# Altium PCB ECG_ACCEL_Board.PcbDoc
Units mm, origin at the board's own origin, x right, y up, seen from the top; angles counter-clockwise.
Board outline 30 x 19 mm, 4 copper layers (Top Layer, Int1 (GND), Int2 (PWR), Bottom Layer), stack 1.334 mm thick; 55 components, 35 nets, 191 pads, 96 vias.
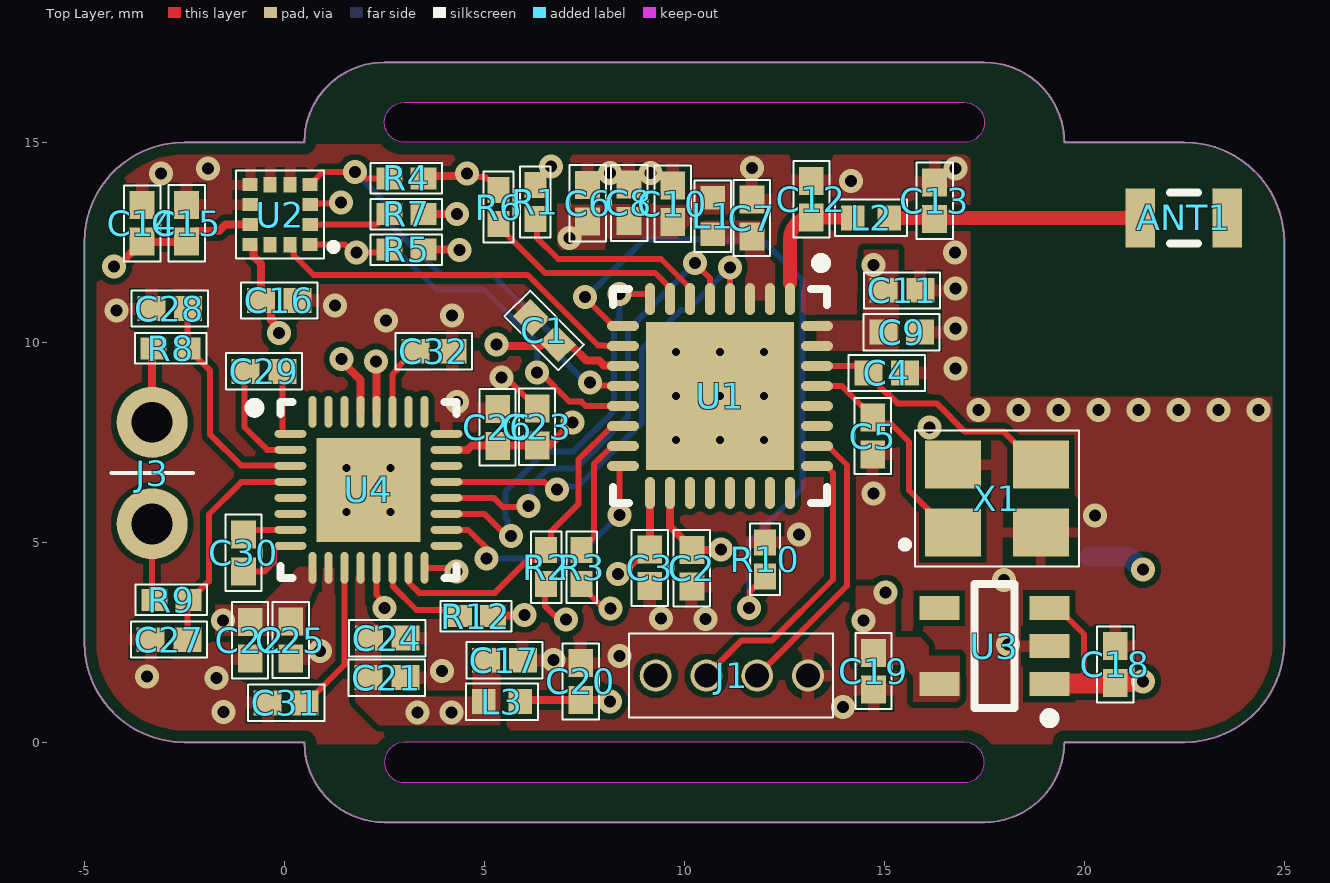
[diagram p0: Top Layer view]
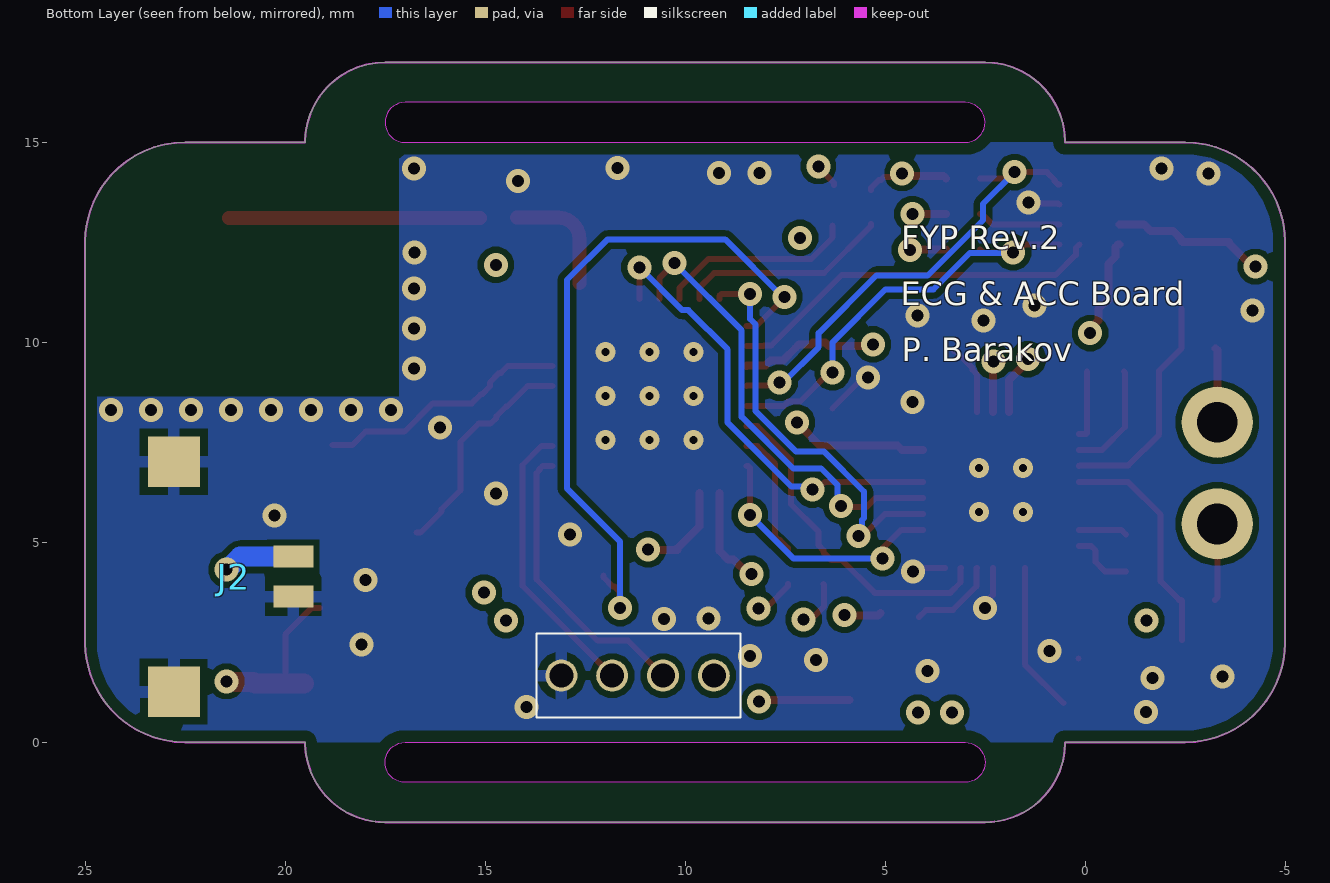
[diagram p1: Bottom Layer view, seen from below]
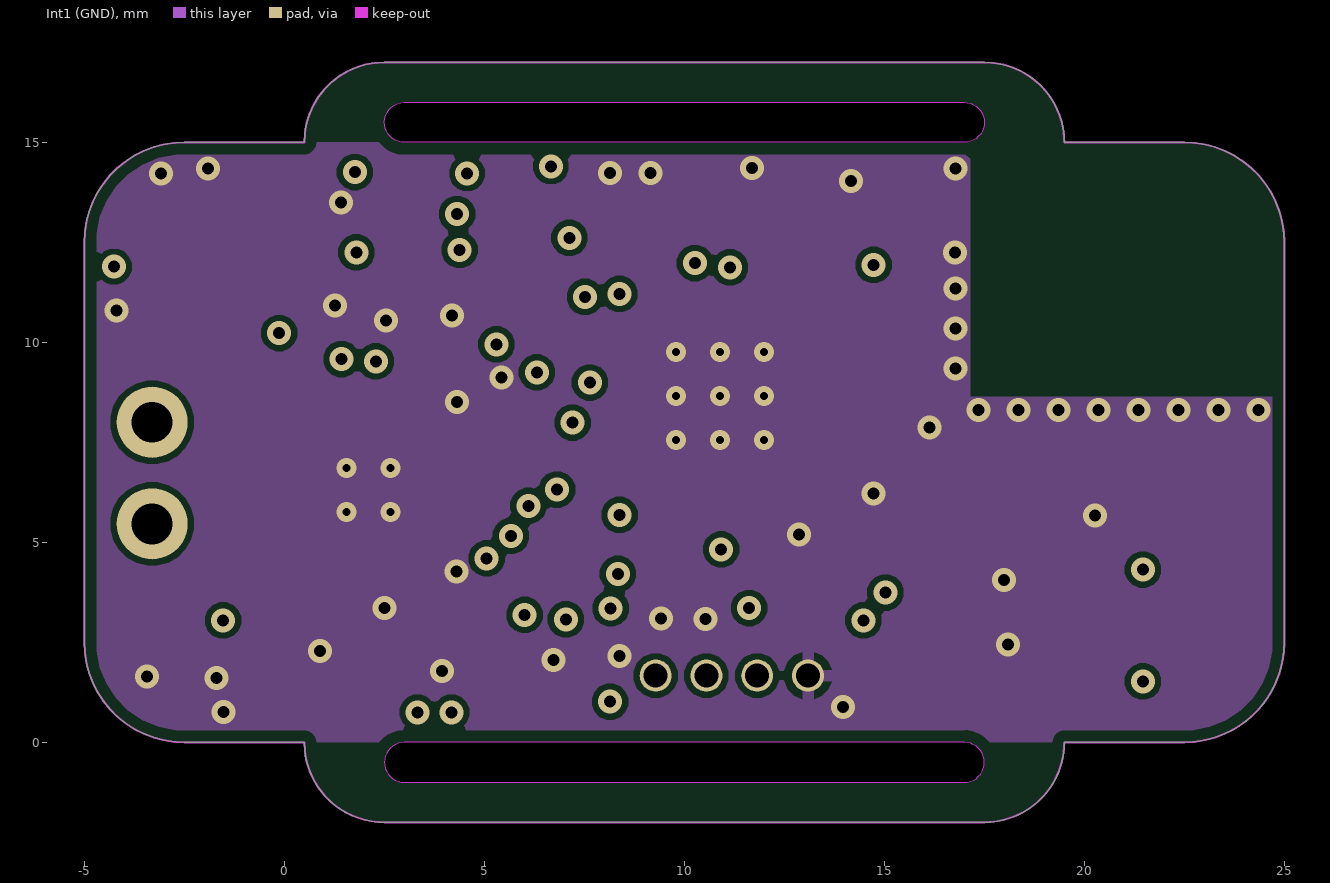
[diagram p2: Int1 (GND)]
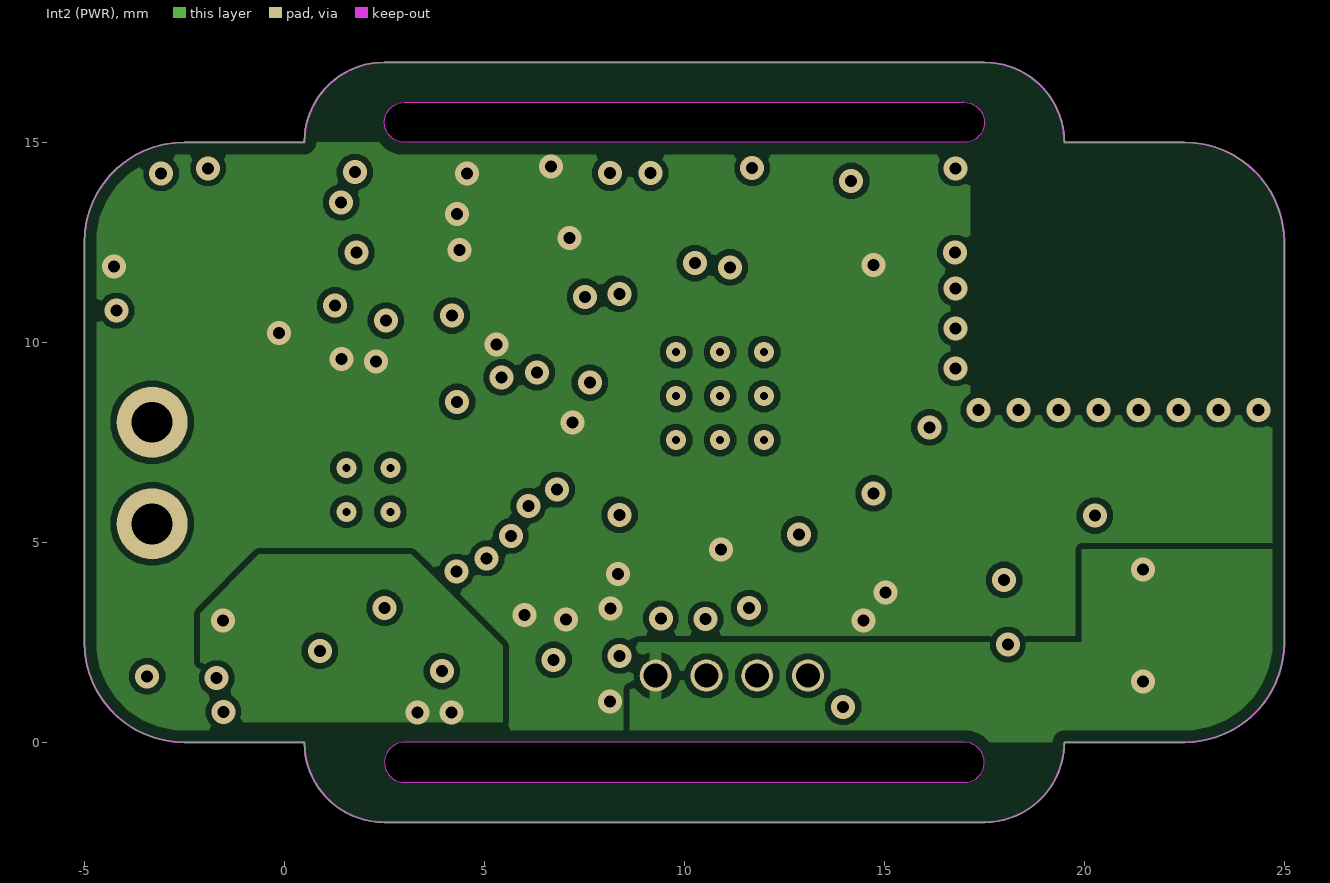
[diagram p3: Int2 (PWR)]
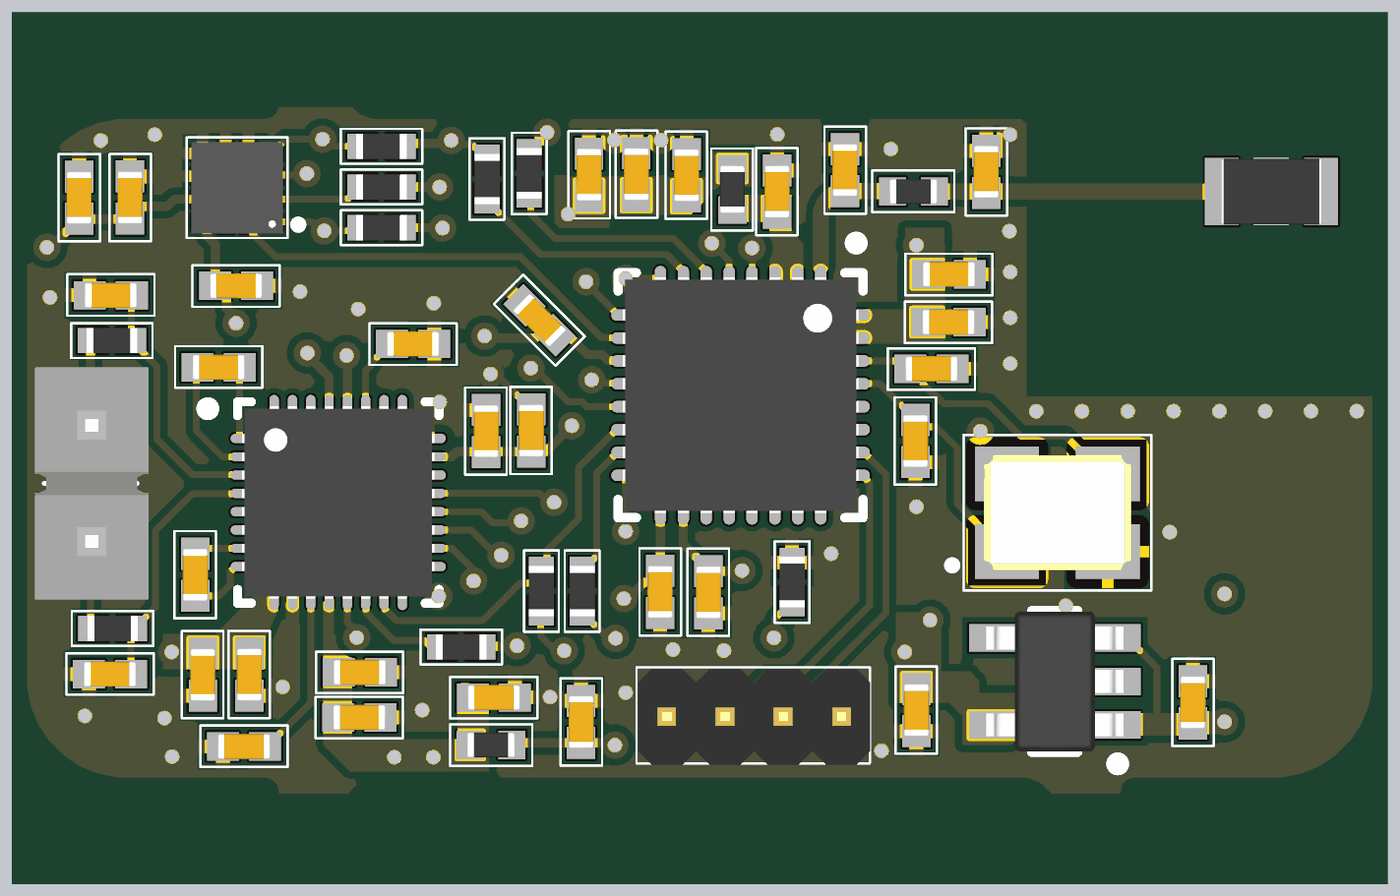
[diagram p4: 3D render of the assembled board from above, using the file's embedded part models]

## Layer stack, top to bottom
Top Solder: solder mask 0.0254, SM-001, Dk 4
Top Layer: signal copper 0.035
Dielectric 1: prepreg 0.1295, PP-017, Dk 4.3
Dielectric 2: prepreg 0.1295, PP-017, Dk 4.3
Int1 (GND): signal copper 0.0175
Dielectric 3: core 0.7112, Core-039, Dk 4.8
Int2 (PWR): signal copper 0.0175
Dielectric 4: prepreg 0.1295, PP-017, Dk 4.3
Dielectric 5: prepreg 0.1295, PP-017, Dk 4.3
Bottom Layer: signal copper 0.035
Bottom Solder: solder mask 0.0254, SM-001, Dk 4

## Board outline
-2.5,0 0.5,0 ccw(c2.5,0) 2.5,-2 17.5,-2 ccw(c17.5,0) 19.5,0 22.5,0 ccw(c22.5,2.5) 25,2.5 25,12.5 ccw(c22.5,12.5) 22.5,15 19.5,15 ccw(c17.5,15) 17.5,17 2.5,17 ccw(c2.5,15) 0.5,15 -2.5,15 ccw(c-2.5,12.5) -5,12.5 -5,2.5 ccw(c-2.5,2.5)
cut-out: 2.5,-0.5 ccw(c3,-0.5) 3,-1 17,-1 ccw(c17,-0.5) 17.5,-0.5 ccw(c17,-0.5) 17,0 3,0 ccw(c3,-0.5)
cut-out: 3,15 cw(c3,15.5) 2.5,15.5 cw(c3,15.5) 3,16 17,16 cw(c17,15.5) 17.5,15.5 cw(c17,15.5) 17,15

## Design rules (kind name [scope] priority, off if disabled: settings)
BoardOutlineClearance BoardOutlineClearance_1 [All] p1: gap=0.3 ignorepadtopadclearanceinfootprint=FALSE
Clearance "Stitching GND" [IsStitchingVia and InNet('GND') vs (IsVia and (Not IsStitchingVia)) Or IsPad] p1: gap=0.1 ignorepadtopadclearanceinfootprint=FALSE
Clearance Clearance_1 [(ExistsOnLayer('Int1 (GND)') Or ExistsOnLayer('Int2 (PWR)')) vs (ExistsOnLayer('Int1 (GND)') Or ExistsOnLayer('Int2 (PWR)'))] p2: gap=0.15 ignorepadtopadclearanceinfootprint=FALSE except(0.2: Arc-Arc Arc-Track Arc-Text Track-Track Track-Text Text-Text; 0.254: Hole-Hole) sourcerule=47 cellrowname=All cellrowtype=0 cellcolname=All cellcoltype=0 innerlayers=TRUE
Clearance Clearance_2 [(ExistsOnLayer('Top Layer') Or ExistsOnLayer('Bottom Layer')) vs (ExistsOnLayer('Top Layer') Or ExistsOnLayer('Bottom Layer'))] p3: gap=0.15 ignorepadtopadclearanceinfootprint=FALSE except(0.2: Arc-Arc Arc-Track Arc-Text Track-Track Track-Text Text-Text; 0.254: Hole-Hole) sourcerule=47 cellrowname=All cellrowtype=0 cellcolname=All cellcoltype=0 outerlayers=TRUE
Clearance [All] p4: gap=0.254 ignorepadtopadclearanceinfootprint=FALSE ismatrix=TRUE
HoleSize None [HasFootprint('QFN*') OR HasFootprint('XCL2*')] p1: absolutevalues=TRUE maxlimit=2.54 minlimit=0 maxpercent=80.000 minpercent=20.000
HoleSize [All] p2: absolutevalues=TRUE maxlimit=6.3 minlimit=0.3 maxpercent=80.000 minpercent=20.000
HoleToHoleClearance [All] p1: gap=0.5 allowstackedmicrovias=TRUE
MinimumSolderMaskSliver MinimumSolderMaskSliver_1 [All] p1: minsoldermaskwidth=0
MinimumSolderMaskSliver [All] p2: minsoldermaskwidth=0.1
PlaneConnect [All] p1: planeconnectstyle=Relief reliefexpansion=0.508 reliefentries=2 reliefconductorwidth=0.254 reliefairgap=0.254
PolygonConnect GND_Via_Connect [IsVia] p1: thpad.connectstyle=Relief thpad.reliefconductorwidth=0.3 thpad.reliefentries=2 thpad.polygonreliefangle="0 Angle" thpad.airgapwidth=0.2 smdpad.connectstyle=Relief smdpad.reliefconductorwidth=0.3 smdpad.reliefentries=2 smdpad.polygonreliefangle="0 Angle" smdpad.airgapwidth=0.2 via.connectstyle=Direct via.reliefconductorwidth=0.254 via.reliefentries=2 via.polygonreliefangle="0 Angle" via.airgapwidth=0.254
PolygonConnect "Direct Connect" [IsNamedPolygon('3.3VPOUR1') OR IsNamedPolygon('3.3V_PINS2_3') OR IsNamedPolygon('3.3V_POUR2') OR IsNamedPolygon('3.3V_POUR3') OR IsNamedPolygon('3.3V_POUR4') OR IsNamedPolygon('FB_POUR') OR IsNamedPolygon('1.8V_BUCK_POUR') OR IsNamedPolygon('1.8V_BOTTOM') OR IsNamedPolygon('+A3V3_POUR1') OR IsNamedPolygon('A3V3_POUR2')] p2: connectstyle=Direct reliefconductorwidth=0.3 reliefentries=4 polygonreliefangle="45 Angle" airgapwidth=0.2
PolygonConnect [All] p3: connectstyle=Relief reliefconductorwidth=0.3 reliefentries=4 polygonreliefangle="90 Angle" airgapwidth=0.2
RoutingVias [All] p1: holewidth=0.3 width=0.6 viastyle="Through Hole" minholewidth=0.3 minwidth=0.6 maxholewidth=0.3 maxwidth=0.6
SilkToSilkClearance [All] p1: silktosilkclearance=0.1
SilkToSolderMaskClearance [IsPad] p1: minsilkscreentomaskgap=0.08 clearancetoexposedcopper=TRUE
SolderMaskExpansion ViaMasl [IsVia] p1: expansion=0.102 istentingtop=TRUE useseparateexpansions=TRUE expansionbottom=0.102 istentingbottom=TRUE
SolderMaskExpansion [All] p2: expansion=0.05 istentingtop=FALSE
SupplyNets "Schematic Supply Nets_1" [InNet('+A3.3V')] p1: voltage=0.000
SupplyNets "Schematic Supply Nets_3" [InNet('+VBAT')] p2: voltage=0.000
SupplyNets "Schematic Supply Nets_2" [InNet('GND')] p3: voltage=0.000
SupplyNets "Schematic Supply Nets" [InNet('+3.3V')] p4: voltage=0.000
UnRoutedNet [All] p1: checkbadconnections=TRUE
Width MaxMinWidth_1 [All] p1: maxlimit=0.7 minlimit=0.1 preferedwidth=0.15 minimp=50.000000 maximp=50.000000 favimp=50.000000
23 further rules are at their usual default settings.

## Classes and differential pairs
component class SH1: C17 C20 C21 C22 C23 C24 C25 C26 C27 C28 C29 C30 C31 C32 J3 L3 R8 R9 R12 U4
component class ECG_ACCEL_Board: ANT1 C1 C2 C3 C4 C5 C6 C7 C8 C9 C10 C11 C12 C13 C14 C15 C16 C18 C19 J1 J2 L1 L2 R1 R2 R3 R4 R5 R6 R7 R10 U1 U2 U3 X1

## Components (designator, comment, footprint, x,y, rotation, side; value= is the part's Value field where it differs from the comment)
ANT1 "2.4GHZ_ANT_50_OHM" Chip2PinSM127P600-8N 22.488,13.109 r0 top
C1 "C_0402_0.1uF" C_0402 6.501,10.299 r135 top
C2 "C_0402_0.1uF" C_0402 10.191,4.352 r90 top
C3 "C_0402_0.1uF" C_0402 9.134,4.363 r270 top
C4 "C_0402_10pF" C_0402 15.061,9.236 r180 top
C5 "C_0402_10pF" C_0402 14.712,7.658 r90 top
C6 "C_0402_10uF" C_0402 7.581,13.477 r270 top
C7 "C_0402_0.1uF" C_0402 11.689,13.107 r90 top
C8 "C_0402_1uF" C_0402 8.615,13.487 r270 top
C9 "C_0402_10nF" C_0402 15.434,10.256 r180 top
C10 "C_0402_0.1uF" C_0402 9.712,13.464 r90 top
C11 "C_0402_0.1uF" C_0402 15.442,11.3 r180 top
C12 "C_0402_3.3pF" C_0402 13.173,13.577 r270 top
C13 "C_0402_3.3pF" C_0402 16.256,13.54 r270 top
C14 "C_0402_10uF" C_0402 -3.557,12.975 r270 top
C15 "C_0402_0.1uF" C_0402 -2.445,12.979 r270 top
C16 "C_0402_0.1uF" C_0402 -0.127,11.049 r180 top
C17 "C_0402_0.1uF" C_0402 5.503,2.054 r180 top
C18 "C_0402_1uF" C_0402 20.771,1.948 r270 top
C19 "C_0402_1uF" C_0402 14.732,1.778 r90 top
C20 "C_0402_0.1uF" C_0402 7.409,1.521 r270 top
C21 "C_0402_1uF" C_0402 2.565,1.62 r180 top
C22 "C_0402_1uF" C_0402 -0.853,2.552 r90 top
C23 "C_0402_1uF" C_0402 6.321,7.886 r90 top
C24 "C_0402_0.1uF" C_0402 2.574,2.606 r180 top
C25 "C_0402_0.1uF" C_0402 0.163,2.555 r90 top
C26 "C_0402_0.1uF" C_0402 5.334,7.874 r90 top
C27 "C_0402_4.7nF" C_0402 -2.883,2.564 r0 top
C28 "C_0402_4.7nF" C_0402 -2.865,10.843 r0 top
C29 "C_0402_4.7nF" C_0402 -0.508,9.271 r0 top
C30 "C_0402_4.7nF" C_0402 -1.017,4.736 r90 top
C31 "C_0402_1uF" C_0402 0.045,0.984 r0 top
C32 "C_0402_1uF" C_0402 3.739,9.779 r180 top
J1 "4PIN_HEADER_1.27" 4PIN_HEADER_1.27-Footprint-1 13.092,1.669 r180 top
J2 "503763-0291" "Molex 503763-0291" 20.443,4.64 r90 bottom
J3 "2PIN_2.54mm" 2PIN_2.54mm-Footprint-1 -3.305,8.001 r270 top
L1 "L_0402_2.2nH" L_0402 10.713,13.157 r270 top
L2 "L_0402_2.2nH" L_0402 14.667,13.109 r180 top
L3 "L_0402_2.2nH" L_0402 5.441,1.018 r0 top
R1 "R_0402_4k7" R_0402 6.275,13.505 r270 top
R2 "R_0402_4k7" R_0402 6.542,4.378 r90 top
R3 "R_0402_4k7" R_0402 7.431,4.378 r90 top
R4 "R_0402_4k7" R_0402 3.048,14.097 r180 top
R5 "R_0402_4k7" R_0402 3.048,12.319 r180 top
R6 "R_0402_4k7" R_0402 5.354,13.38 r270 top
R7 "R_0402_4k7" R_0402 3.048,13.208 r180 top
R8 "R_0402_51k" R_0402 -2.84,9.851 r180 top
R9 "R_0402_51k" R_0402 -2.826,3.562 r180 top
R10 "R_0402_4k7" R_0402 12.017,4.576 r90 top
R12 "R_0402_4k7" R_0402 4.79,3.157 r0 top
U1 "ESP32-C3" QFN127P600-8N#1 10.892,8.658 r270 top
U2 "LIS2DE12" LIS2DE12-Footprint-1 0.645,12.443 r180 top
U3 "TLV75533PDBVR" SOT95P280X145-5N 17.754,2.405 r180 top
U4 "ADS1292" QFN127P600-8N#2 2.104,6.314 r0 top
X1 "40MHz_OSC" 40MHz_OSC-Footprint-1 16.713,6.942 r0 top

## Footprints (in the part's own frame and the unit in brackets; to place one, negate y for a bottom-side part, rotate by r counter-clockwise, add the part's x,y. Pads: shape width x height; smd on the part's side, far side on the other; paste and mask are expansions set on the pad)
2PIN_2.54mm-Footprint-1 [mil]
  round 70 hole 40.16: 1(0,0) 2(100,0)
  silkscreen extent 50,-40 50,40, body extent -50,-48 150,50, height 330
4PIN_HEADER_1.27-Footprint-1 [mm]
  round 0.8 hole 0.6: 1(0,0) 2(1.27,0) 3(2.54,0) 4(3.81,0)
  silkscreen extent -0.63,-1.05 4.47,1.05, body extent -0.64,-1.02 4.44,1.08, height 4
40MHz_OSC-Footprint-1 [mm]
  rect 1.4x1.2 smd mask+0.2: 1(0,-1.7) 2(2.2,-1.7) 3(2.2,0) 4(0,0)
  silkscreen extent -1.25,-2.55 3.15,0.85, body extent -0.5,-2.1 2.7,0.4, height 0.6
C_0402 [mm]
  rect 0.7x0.62 smd: 1(-0.46,0) 2(0.46,0)
  silkscreen extent -0.95,-0.45 0.95,0.46, body extent -0.58,-0.28 0.57,0.28, height 0.55
Chip2PinSM127P600-8N [mm]
  rect 0.74x1.47 smd: 1(-1.085,0) 2(1.085,0)
  silkscreen extent -0.35,-0.64 0.35,0.64, body extent -1.1,-0.72 1.1,0.72, height 1.2
L_0402 [mm]
  rect 0.59x0.62 smd: 1(-0.455,0) 2(0.455,0)
  silkscreen extent -0.89,-0.46 0.9,0.45, body extent -0.53,-0.28 0.53,0.28, height 0.55
LIS2DE12-Footprint-1 [mm]
  rect 0.38x0.32 smd mask+0.1: 1(0,0) 4(0,-1.5) 7(1.5,-1.5) 10(1.5,0)
  rect 0.39x0.32 smd mask+0.1: 2(0,-0.5) 3(0,-1) 8(1.5,-1) 9(1.5,-0.5)
  rect 0.32x0.39 smd mask+0.1: 5(0.5,-1.5) 6(1,-1.5) 11(1,0) 12(0.5,0)
  silkscreen extent -0.64,-1.85 1.85,0.35, body extent -0.25,-1.75 1.75,0.25, height 1
"Molex 503763-0291" [mm] "Picolock 1.0mm pitch 2-pin"
  rect 0.55x1 smd: 1(0,-0.65) 2(-1,-0.65)
  rect 1.26x1.3 smd: 3(2.375,2.34) 4(-3.375,2.34)
  body extent -3.88,-1.03 2.72,4.16, height 1.47
QFN127P600-8N#1 [mm]
  oval 0.8x0.25 smd: 1(-2.425,1.75) 2(-2.425,1.25) 3(-2.425,0.75) 4(-2.425,0.25) 5(-2.425,-0.25) 6(-2.425,-0.75) 7(-2.425,-1.25) 8(-2.425,-1.75) 17(2.425,-1.75) 18(2.425,-1.25) 19(2.425,-0.75) 20(2.425,-0.25) 21(2.425,0.25) 22(2.425,0.75) 23(2.425,1.25) 24(2.425,1.75)
  oval 0.25x0.8 smd: 9(-1.75,-2.425) 10(-1.25,-2.425) 11(-0.75,-2.425) 12(-0.25,-2.425) 13(0.25,-2.425) 14(0.75,-2.425) 15(1.25,-2.425) 16(1.75,-2.425) 25(1.75,2.425) 26(1.25,2.425) 27(0.75,2.425) 28(0.25,2.425) 29(-0.25,2.425) 30(-0.75,2.425) 31(-1.25,2.425) 32(-1.75,2.425)
  rect 3.7x3.7 smd: 33(0,0)
  silkscreen extent -3.45,-2.68 2.68,2.67, body extent -2.58,-2.58 2.58,2.58, height 0.9
QFN127P600-8N#2 [mm]
  oval 0.8x0.2 smd: 1(-1.95,1.4) 2(-1.95,1) 3(-1.95,0.6) 4(-1.95,0.2) 5(-1.95,-0.2) 6(-1.95,-0.6) 7(-1.95,-1) 8(-1.95,-1.4) 17(1.95,-1.4) 18(1.95,-1) 19(1.95,-0.6) 20(1.95,-0.2) 21(1.95,0.2) 22(1.95,0.6) 23(1.95,1) 24(1.95,1.4)
  oval 0.2x0.8 smd: 9(-1.4,-1.95) 10(-1,-1.95) 11(-0.6,-1.95) 12(-0.2,-1.95) 13(0.2,-1.95) 14(0.6,-1.95) 15(1,-1.95) 16(1.4,-1.95) 25(1.4,1.95) 26(1,1.95) 27(0.6,1.95) 28(0.2,1.95) 29(-0.2,1.95) 30(-0.6,1.95) 31(-1,1.95) 32(-1.4,1.95)
  rect 2.6x2.6 smd: 33(0,0)
  silkscreen extent -2.97,-2.2 2.2,2.2, body extent -2.1,-2.1 2.1,2.1, height 0.9
R_0402 [mm]
  rect 0.65x0.55 smd: 1(-0.425,0) 2(0.425,0)
  silkscreen extent -0.89,-0.38 0.89,0.38, body extent -0.55,-0.28 0.55,0.28, height 0.4
SOT95P280X145-5N [mm] "SOT23, 5-Leads, Body 2.90x2.80mm, Pitch 0.95mm, IPC Medium Density"
  rect 1x0.6 smd: 1(-1.375,0.95) 2(-1.375,0) 3(-1.375,-0.95) 4(1.375,-0.95) 5(1.375,0.95)
  silkscreen extent -1.5,-1.55 0.5,1.92, body extent -1.5,-1.53 1.5,1.53, height 1.45

## Part data
ANT1: library part CMP-00009-6, "2.4GHz Chip Antenna 50 Ohm Impedance ANT2012LL00R2400A", Distributor=Mouser, Order Code=603-ANT2012LL00R2400
C1 C2 C3 C7 C10 C11 C15 C16 C17 C20 C24 C25 C26: library part CMP-00055-1, JLC Part Number=C1525
C4 C5: library part CMP-00051-1, JLC Part Number=C32949
C6 C14: library part CMP-00052-1, JLC Part Number=C15525
C8 C18 C19 C21 C22 C23 C31 C32: library part CMP-00053-1, JLC Part Number=C52923
C9: library part CMP-00054-1, JLC Part Number=C15195
C12 C13: library part CMP-00056-1, JLC Part Number=C326841
C27 C28 C29 C30: library part CMP-00064-1, JLC Part Number=C1538
J1: library part CMP-00049-2, Distributor=Mouser, Order Code=855-M50-3530442
J2: library part CMP-007-000000-2, "Molex 503763-0291", Design Item ID=503763-0291, Distributor=Mouser, Order Code=538-503763-0291
J3: library part CMP-00018-3, "2 pin power input", JLC Part Number=C5360898
L1 L2 L3: library part CMP-00057-1, JLC Part Number=C92035
R1 R2 R3 R4 R5 R6 R7 R10 R12: library part CMP-00050-1, JLC Part Number=C25900
R8 R9: library part CMP-00063-1, JLC Part Number=C25794
U1: library part CMP-00008-4, "33 pin ESP32_C3 Microcontroller", JLC Part Number=C2858491
U2: library part CMP-00005-10, "Accelerometers MEMS digital output motion sensor: ultra-low-power high-performance 3-axis \"femt", JLC Part Number=C155639, Distributor=Mouser, Order Code=511-LIS2DE12TR
U3: library part CMP-00019-2, "LDO Voltage Regulators 500-mA high-PSRR low-IQ low-dropout voltage regulator with enable 5-SOT-23 -40 to 125", JLC Part Number=C404027
U4: library part CMP-00026-5, "ECG Analog Front End - AFE 2-Channel,24B ADC", JLC Part Number=C456281, Distributor=Mouser, Order Code=595-ADS1292RIRSMT
X1: library part CMP-00029-2, "40 MHZ Oscillator, 10pF load capacitance", JLC Part Number=C426988

## Via types
v1: diameter 0.6, hole 0.3, Top Layer to Bottom Layer, tented both sides, 83 vias
v2: diameter 0.5, hole 0.2, Top Layer to Bottom Layer, tented both sides, 13 vias

## Nets (pads, with @x,y where several pads share a name; then routed paths per layer and width w, separated by ;. In a path a pad name is that pad's centre, name@x,y a point inside that pad or via, vN(x,y) a via of type N, cw(c..) or ccw(c..) an arc to the next point about the centre after c; other vN are vias at no path point)
+3.3V: C1.1 C2.2 C3.1 C6.2 C8.2 C9.2 C10.1 C11.2 C14.2 C15.2 C16.2 C19.2 C20.2 C23.1 C26.1 L1.1 L3.2 R1.1 R2.1 R3.1 R4.1 R5.1 R6.1 R7.1 R12.2 U1.11 U1.17 U1.18 U1.31 U1.32 U2.9 U2.10 U3.5 U4.23 U4.28 U4.29 | length 30.9
  Top Layer w0.15: v1(4.572,14.224) 4.658,14.138 5.022,14.138 5.104,14.055 5.154,14.055 5.354,13.855 R6.1 ; R1.1 6.275,13.98 6.665,14.37 v1(6.665,14.4) ; R2.1 6.521,3.932 6.521,3.403 6.763,3.161 6.953,3.161 v1(7.039,3.075) ; R3.1 7.431,3.903 7.901,3.434 8.074,3.434 v1(8.16,3.348)
  Top Layer w0.2: v1(-4.257,11.89) -4.177,11.89 -3.599,12.467 -3.599,12.507 -2.439,12.507 -2.413,12.533 -2.413,12.573 -2.203,12.783 -1.637,12.783 -1.477,12.943 U2.9 ; U2.10 -0.825,12.443 -0.765,12.383 -0.765,12.266 -0.765,12.144 -0.586,11.965 C16.2@-0.586,11.05 ; C16.2 -0.547,11.049 -0.337,10.839 -0.337,10.55 -0.128,10.341 v1(-0.128,10.232) ; v1(1.43,9.581) 1.43,9.53 1.904,9.057 U4.29 ; v1(2.286,9.525) 2.304,9.507 U4.28 ; R5.1 4.375,12.319 v1(4.382,12.311) ; R7.1 v1(4.318,13.208) ; R4.1 3.537,14.16 4.508,14.16 v1(4.572,14.224) ; U4.23 4.583,7.314 4.695,7.426 5.305,7.426 C23.1 6.64,7.426 v1(7.206,7.992) ; R12.2@5.113,3.234 5.177,3.17 5.997,3.17 v1(6.01,3.183) ; v1(5.302,9.95) 5.346,9.907 6.406,9.907 6.501,10.002 6.798,10.002 6.854,9.945 7.151,9.945 7.234,9.862 7.551,9.545 7.867,9.545 7.995,9.417 8.457,9.417 U1.11 ; L3.2@5.896,1.061 C20.2 8.1,1.061 v1(8.146,1.015) ; v1(8.341,4.214) 8.431,4.214 8.79,4.573 8.924,4.573 9.134,4.783 C3.1 9.142,4.831 U1.17 ; U1.18 9.642,5.401 10.191,4.852 C2.2 10.908,4.812 v1(10.922,4.826)
  other v1: 14.478,3.048 15.028,3.744 14.732,11.938 7.125,12.613
+A3.3V: C17.2 C21.2 C22.2 C24.2 C25.2 L3.1 U4.9 U4.12
  other v1: 3.329,0.749 4.18,0.749 -1.532,3.048
+VBAT: C18.2 J1.4 J2.1 U3.1 U3.3 | length 5.8
  Top Layer w0.15: U3.3@19.129,3.364 19.329,3.364 19.992,2.701 19.992,1.466
  Top Layer w0.5: U3.1@19.526,1.466 19.992,1.466 20.749,1.466 20.789,1.506 21.445,1.506 v1(21.463,1.524)
  Bottom Layer w0.5: J2.1@20.121,4.64 21.124,4.64 21.446,4.318 v1(21.463,4.318)
ACC_INT: U1.10 U2.12 | length 9.5
  Top Layer w0.15: U2.12 0.23,12.358 0.23,12.189 0.735,11.684 6.081,11.684 7.844,9.92 8.023,9.92 8.034,9.909 8.466,9.909 U1.10
ANT: ANT1.1 C13.2 L2.1 | length 6.5
  Top Layer w0.35: L2.1 ANT1.1 ; C13.2@16.266,13.109 C13.2@16.485,13.109
ECG1_N: C28.2 R8.1 U4.3 | length 5.7
  Top Layer w0.15: C28.2 -2.415,10.832 R8.1 -1.853,9.289 -1.853,7.694 -1.083,6.924 0.145,6.924 U4.3
ECG1_P: C27.2 R9.1 U4.4 | length 5.8
  Top Layer w0.15: C27.2 -2.423,3.54 R9.1 -2.351,3.562 -1.887,4.026 -1.887,5.696 -1.078,6.504 0.145,6.504 U4.4
ECG_CS: U1.16 U4.18 | length 6.7
  Top Layer w0.15: U4.18 4.592,5.314 5.207,4.699 5.207,4.672 5.134,4.599 v1(5.059,4.599) ; v1(8.38,5.685) 8.38,6.862 8.427,6.908 U1.16
  Bottom Layer w0.15: v1(5.059,4.599) 7.294,4.599 v1(8.38,5.685)
ECG_DIN: U1.8 U4.19 | length 10.4
  Top Layer w0.15: U4.19 5,5.714 5.552,5.162 v1(5.662,5.162) ; v1(8.377,11.209) 9.096,11.209 9.142,11.162 U1.8
  Bottom Layer w0.15: v1(5.662,5.162) 5.576,5.248 5.576,5.557 5.527,5.606 5.527,6.267 6.533,7.274 7.23,7.274 8.236,8.28 8.236,10.446 8.377,10.588 v1(8.377,11.209)
ECG_DOUT: U1.4 U4.21 | length 11.3
  Top Layer w0.15: U4.21 6.501,6.514 6.695,6.32 v1(6.817,6.32) ; U1.4 v1@11.141,11.874
  Bottom Layer w0.15: v1(6.817,6.32) 6.893,6.396 7.342,6.396 8.936,7.99 8.936,9.825 9.918,10.807 10.072,10.807 v1(11.14,11.875)
ECG_RESET: R2.2 U1.14 U4.15 | length 8.4
  Top Layer w0.15: U4.15 3.114,4.354 3.114,3.995 3.37,3.739 5.263,3.739 6.077,4.553 6.342,4.553 6.542,4.753 R2.2 6.662,4.923 6.662,5.265 7.352,5.955 7.352,7.068 8.192,7.908 U1.14
ECG_SCLK: U1.5 U4.20 | length 11.4
  Top Layer w0.15: U4.20 5.233,6.114 5.47,5.877 6.064,5.877 v1(6.098,5.911) ; v1(10.264,11.979) 10.642,11.6 U1.5
  Bottom Layer w0.15: v1(6.098,5.911) 6.184,5.997 6.184,6.43 6.599,6.845 7.296,6.845 8.586,8.135 8.586,10.301 v1(10.264,11.979)
ESP_BOOT: R3.2 U1.15 | length 3.2
  Top Layer w0.15: R3.2 7.431,4.853 7.631,5.053 7.659,5.053 7.747,5.141 7.747,6.963 8.192,7.408 U1.15
ESP_EN: R6.2 U1.7 | length 5.3
  Top Layer w0.15: R6.2 5.354,12.905 6.526,11.734 9.271,11.734 9.642,11.363 U1.7
GND: C1.2 C2.1 C3.2 C4.1 C5.1 C6.1 C7.2 C8.1 C9.1 C10.2 C11.1 C12.1 C13.1 C14.1 C15.1 C16.1 C17.1 C18.1 C19.1 C20.1 C21.1 C22.1 C23.2 C24.1 C25.1 C26.2 C27.1 C28.1 C31.1 C32.1 J1.1 J2.2 J2.3 J2.4 R10.2 U1.33 U2.3 U2.5 U2.6 U2.7 U2.8 U3.2 U4.10 U4.13 U4.16 U4.24 U4.33 X1.2 X1.4 | length 4
  Top Layer w0.15: C25.1@0.16,2.092 C25.1 ; U2.3 0.673,13.471 1.39,13.471 v1(1.419,13.5) ; U4.13 2.304,3.689 2.507,3.486 v1(2.507,3.364) ; U4.16 4.202,4.364 v1(4.299,4.267) ; v1(5.432,9.123) 5.435,9.125 5.435,9.139 5.528,9.139 C23.2
  other v1: -1.524,0.762 13.97,0.889 -1.691,1.604 -3.429,1.651 3.937,1.778 6.73,2.063 8.382,2.159 0.889,2.286 18.088,2.443 10.529,3.079 9.415,3.101 17.995,4.059 12.871,5.197 20.265,5.666 14.732,6.223 16.129,7.874 17.35,8.307 18.35,8.308 19.35,8.308 20.35,8.309 21.35,8.309 22.35,8.31 23.35,8.31 24.35,8.31 4.318,8.509 16.782,9.351 16.782,10.351 2.54,10.541 4.191,10.668 -4.191,10.795 1.27,10.922 16.781,11.351 16.764,12.243 14.173,14.038 -3.081,14.222 8.138,14.23 9.154,14.23 -1.905,14.351 11.694,14.357 16.78,14.351
  other v2: 1.554,5.764 2.654,5.764 1.554,6.864 2.654,6.864 9.792,7.558 10.892,7.558 11.992,7.558 9.792,8.658 10.892,8.658 11.992,8.658 9.792,9.758 10.892,9.758 11.992,9.758
I2C_SCL: R5.2 U1.13 U2.1 | length 10.8
  Top Layer w0.15: U2.1 1.518,12.443 1.712,12.249 2.553,12.249 R5.2 ; v1(6.311,9.252) 6.394,9.252 7.128,8.517 7.423,8.517 7.532,8.408 U1.13
  Bottom Layer w0.15: v1(1.8,12.249) 1.816,12.233 2.88,12.233 3.793,11.32 4.992,11.32 6.311,10.001 v1(6.311,9.252)
I2C_SDA: R4.2 U1.12 U2.4 | length 11.6
  Top Layer w0.15: U2.4 0.675,13.943 0.76,14.028 0.76,14.058 0.954,14.252 v1(1.762,14.252) 1.884,14.252 2.039,14.097 R4.2 ; v1(7.64,8.995) 7.631,8.986 7.631,8.975 7.679,8.927 8.448,8.927 U1.12
  Bottom Layer w0.15: v1(1.762,14.252) 2.552,13.462 2.552,13.056 3.938,11.67 5.221,11.67 6.661,10.23 6.661,9.878 7.564,8.975 7.631,8.975 7.631,8.986 v1(7.64,8.995)
LED1: R10.1 U1.9 | length 17.5
  Top Layer w0.15: v1(7.518,11.138) 7.518,11.108 8.219,10.408 U1.9 ; v1(11.621,3.357) 11.643,3.379 11.643,3.777 11.767,3.901 11.817,3.901 12.036,4.12 R10.1@12.036,4.17
  Bottom Layer w0.15: v1(7.518,11.138) 7.564,11.138 8.999,12.573 11.938,12.573 12.954,11.557 12.954,6.35 11.621,5.017 v1(11.621,3.357)
MCU_ANT: C12.2 L2.2 U1.1 | length 3
  Top Layer w0.35: U1.1@12.642,11.479 12.642,12.586 cw(c13.173,12.586) C12.2 L2.2@14.204,13.117
NetC4_2: C4.2 U1.30 X1.3 | length 6.4
  Top Layer w0.15: U1.30 14.429,9.408 C4.2 14.641,9.236 14.876,9.001 14.876,8.902 15.086,8.693 15.115,8.693 15.333,8.475 16.307,8.475 17.015,7.767 17.988,7.767 18.326,7.43 X1.3@18.812,7.43
NetC5_2: C5.2 U1.29 X1.1 | length 5.7
  Top Layer w0.15: U1.29 13.938,8.908 14.453,8.393 14.477,8.393 14.712,8.158 C5.2 14.859,7.97 15.159,7.97 15.621,7.508 15.621,6.297 16.088,5.83 16.088,5.767 16.613,5.242 X1.1
NetC7_1: C7.1 L1.2 U1.2 U1.3
NetC29_1: C29.1 U4.2 | length 2.8
  Top Layer w0.15: C29.1 -0.998,9.241 -0.998,7.884 -0.428,7.314 U4.2
NetC29_2: C29.2 U4.1 | length 1.7
  Top Layer w0.15: C29.2 -0.048,7.737 -0.025,7.714 U4.1
NetC30_1: C30.1 U4.8 | length 1.6
  Top Layer w0.15: C30.1 -0.494,4.276 -0.259,4.511 -0.259,4.801 -0.146,4.914 U4.8
NetC30_2: C30.2 U4.7 | length 1.2
  Top Layer w0.15: C30.2 -0.899,5.314 U4.7
NetC31_2: C31.2 U4.11 | length 3.8
  Top Layer w0.15: C31.2@0.545,0.984 1.504,1.943 U4.11
NetC32_2: C32.2 U4.27 | length 1.8
  Top Layer w0.15: U4.27 2.704,9.201 2.811,9.308 2.811,9.351 3.239,9.779 C32.2
NetJ3_1: J3.1 R8.2 | length 1.9
  Top Layer w0.2: J3.1 -3.305,9.811 R8.2
NetJ3_2: J3.2 R9.2 | length 1.9
  Top Layer w0.15: J3.2 -3.305,3.616 R9.2
NetR1_2: R1.2 U1.6 | length 4.9
  Top Layer w0.15: R1.2@6.315,12.923 6.315,12.616 6.847,12.084 9.416,12.084 10.142,11.358 U1.6
NetR7_2: R7.2 U2.2 | length 2.1
  Top Layer w0.15: U2.2 2.308,12.943 2.573,13.208 R7.2
NetR12_1: R12.1 U4.14 | length 2.2
  Top Layer w0.15: U4.14 2.714,4.354 2.714,3.9 3.305,3.308 3.976,3.308 R12.1@4.156,3.127
USB_N: J1.3 U1.25 | length 7.3
  Top Layer w0.15: J1.3 11.427,2.543 12.189,2.543 13.716,4.07 13.716,6.731 13.642,6.805 13.642,6.831 13.565,6.908 U1.25
USB_P: J1.2 U1.26 | length 7.1
  Top Layer w0.15: J1.2 14.066,3.912 14.066,6.934 13.592,7.408 U1.26
pads on no net: ANT1.2 U1.19 U1.20 U1.21 U1.22 U1.23 U1.24 U1.27 U1.28 U2.11 U3.4 U4.5 U4.6 U4.17 U4.22 U4.25 U4.26 U4.30 U4.31 U4.32

## Polygon pours and split planes (outlines as drawn)
GND on Int1 (GND) "NONET_L01_P-001" (solid, pour order 1): -5,0 25,0 25,15 -5,15
GND on Bottom Layer "NONET_L01_P-001" (solid, pour order 16): -5,0 25,0 25,15 -5,15
+A3.3V on Top Layer "A3V3_POUR2" (solid, pour order 9): 0.815,4.388 0.792,3.962 0.52,3.353 0.508,2.667 -1.731,2.667 -1.731,3.443 -0.579,3.443 0.366,4.388
+A3.3V on Top Layer "+A3V3_POUR1" (solid, pour order 12): 1.778,1.016 2.361,0.433 5.4,0.433 5.4,2.36 4.692,2.367 4.711,1.143 2.413,1.143 2.413,3.048 2.009,3.452 2.009,4.368 1.778,4.138
+3.3V on Top Layer "3.3V_POUR2" (solid, pour order 15): 6.827,13.468 6.827,12.241 8.026,12.23 8.026,12.599 9.805,12.599 10.414,13.208 11.186,13.208 11.186,13.97 10.16,13.97 10.16,13.468 9.916,13.468 7.249,13.468
+3.3V on Top Layer "3.3V_POUR4" (solid, pour order 13): 16.896,1.014 15.729,1.014 15.729,1.656 15.446,1.939 14.281,1.939 14.281,3.912 15.277,3.912 15.277,2.63 15.917,2.63 16.11,2.406 16.11,2.159 16.885,2.159
+3.3V on Top Layer "3.3V_POUR3" (solid, pour order 14): 13.311,10.539 13.311,9.784 15.367,9.779 15.348,12.319 14.486,12.319 14.475,10.539
NetC7_1 on Top Layer "3.3V_PINS2_3" (solid, pour order 17): 11.516,11.049 12.261,11.049 12.261,11.97 12.007,12.224 12.007,13.044 10.414,13.044 10.414,12.446 11.525,12.446 11.525,11.609
GND on Top Layer "" (solid, pour order 18): -5,-0.052 25.017,-0.052 25.017,14.948 -5,14.948
+A3.3V on Int2 (PWR) "NONET_L01_P-001" (solid, pour order 5): -0.635,4.699 3.175,4.699 5.461,2.413 5.461,0.508 -2.105,0.508 -2.105,3.229
+VBAT on Int2 (PWR) "NONET_L01_P-001" (solid, pour order 10): 25,0 25.019,0.019 25.019,4.826 19.939,4.826 19.939,2.5 8.636,2.5 8.636,0
+3.3V on Int2 (PWR) "NONET_L01_P-001" (solid, pour order 19): -5,0 25,0 25,15 -5,15

## Keep-outs
Keep-Out Layer:
  the board outline again, w0.05

## Other copper
Top Layer:
  pour cut-out: 17.145,8.636 17.145,14.986 25.019,14.986 25.019,8.636
Int1 (GND):
  pour cut-out: 17.145,8.636 17.145,14.986 25.019,14.986 25.019,8.636
Int2 (PWR):
  pour cut-out: 17.145,8.636 17.145,14.986 25.019,14.986 25.019,8.636
Bottom Layer:
  pour cut-out: 17.145,8.636 17.145,14.986 25.019,14.986 25.019,8.636

## Silkscreen, mask and mechanical layers (free items; w line width, h text height)
Bottom Overlay:
  text "FYP Rev.2" at 4.601,12.127 h1
  text "ECG & ACC Board" at 4.604,10.727 h1
  text "P. Barakov" at 4.581,9.327 h1
Mechanical 1:
  lines w0.05: 2.5,-0.5 cw(c3,-0.5) 3,0 ; 2.5,-0.5 ccw(c3,-0.5) 3,-1 ; 2.5,-0.5 cw(c3,-0.5) 3,0 ; 2.5,-0.5 ccw(c3,-0.5) 3,-1 ; 2.5,-0.5 2.5,-0.5 ; 2.5,-0.5 2.5,-0.5 ; 2.5,15.5 ccw(c3,15.5) 3,15 ; 2.5,15.5 cw(c3,15.5) 3,16 ; 2.5,15.5 ccw(c3,15.5) 3,15 ; 2.5,15.5 cw(c3,15.5) 3,16 ; 2.5,15.5 2.5,15.5 ; 2.5,15.5 2.5,15.5 ; 3,-1 17,-1 ; 3,-1 17,-1 ; 3,0 17,0 ; 3,0 17,0 ; 3,15 17,15 ; 3,15 17,15 ; 3,16 17,16 ; 3,16 17,16 ; 17,-1 ccw(c17,-0.5) 17.5,-0.5 ; 17,-1 ccw(c17,-0.5) 17.5,-0.5 ; 17,0 cw(c17,-0.5) 17.5,-0.5 ; 17,0 cw(c17,-0.5) 17.5,-0.5 ; 17,15 ccw(c17,15.5) 17.5,15.5 ; 17,15 ccw(c17,15.5) 17.5,15.5 ; 17,16 cw(c17,15.5) 17.5,15.5 ; 17,16 cw(c17,15.5) 17.5,15.5 ; 17.5,-0.5 17.5,-0.5 ; 17.5,-0.5 17.5,-0.5 ; 17.5,15.5 17.5,15.5 ; 17.5,15.5 17.5,15.5 ; -5,2.5 ccw(c-2.5,2.5) -2.5,0 0.5,0 ccw(c2.5,0) 2.5,-2 17.5,-2 ccw(c17.5,0) 19.5,0 22.5,0 ccw(c22.5,2.5) 25,2.5 25,12.5 ccw(c22.5,12.5) 22.5,15 19.5,15 ccw(c17.5,15) 17.5,17 2.5,17 ccw(c2.5,15) 0.5,15 -2.5,15 ccw(c-2.5,12.5) -5,12.5 -5,2.5

## Dimensions
22.5,15 to 22.5,0 on Mechanical 1
-5,2.5 to 25,2.5 on Mechanical 1